# Altium PCB Sahasrara_Large-1_review_chandra.PcbDoc
Units mm, origin at the board's own origin, x right, y up, seen from the top; angles counter-clockwise.
Board outline 47.02 x 73.55 mm, 2 copper layers (Top Layer, Bottom Layer); 44 components, 47 nets, 146 pads, 172 vias.
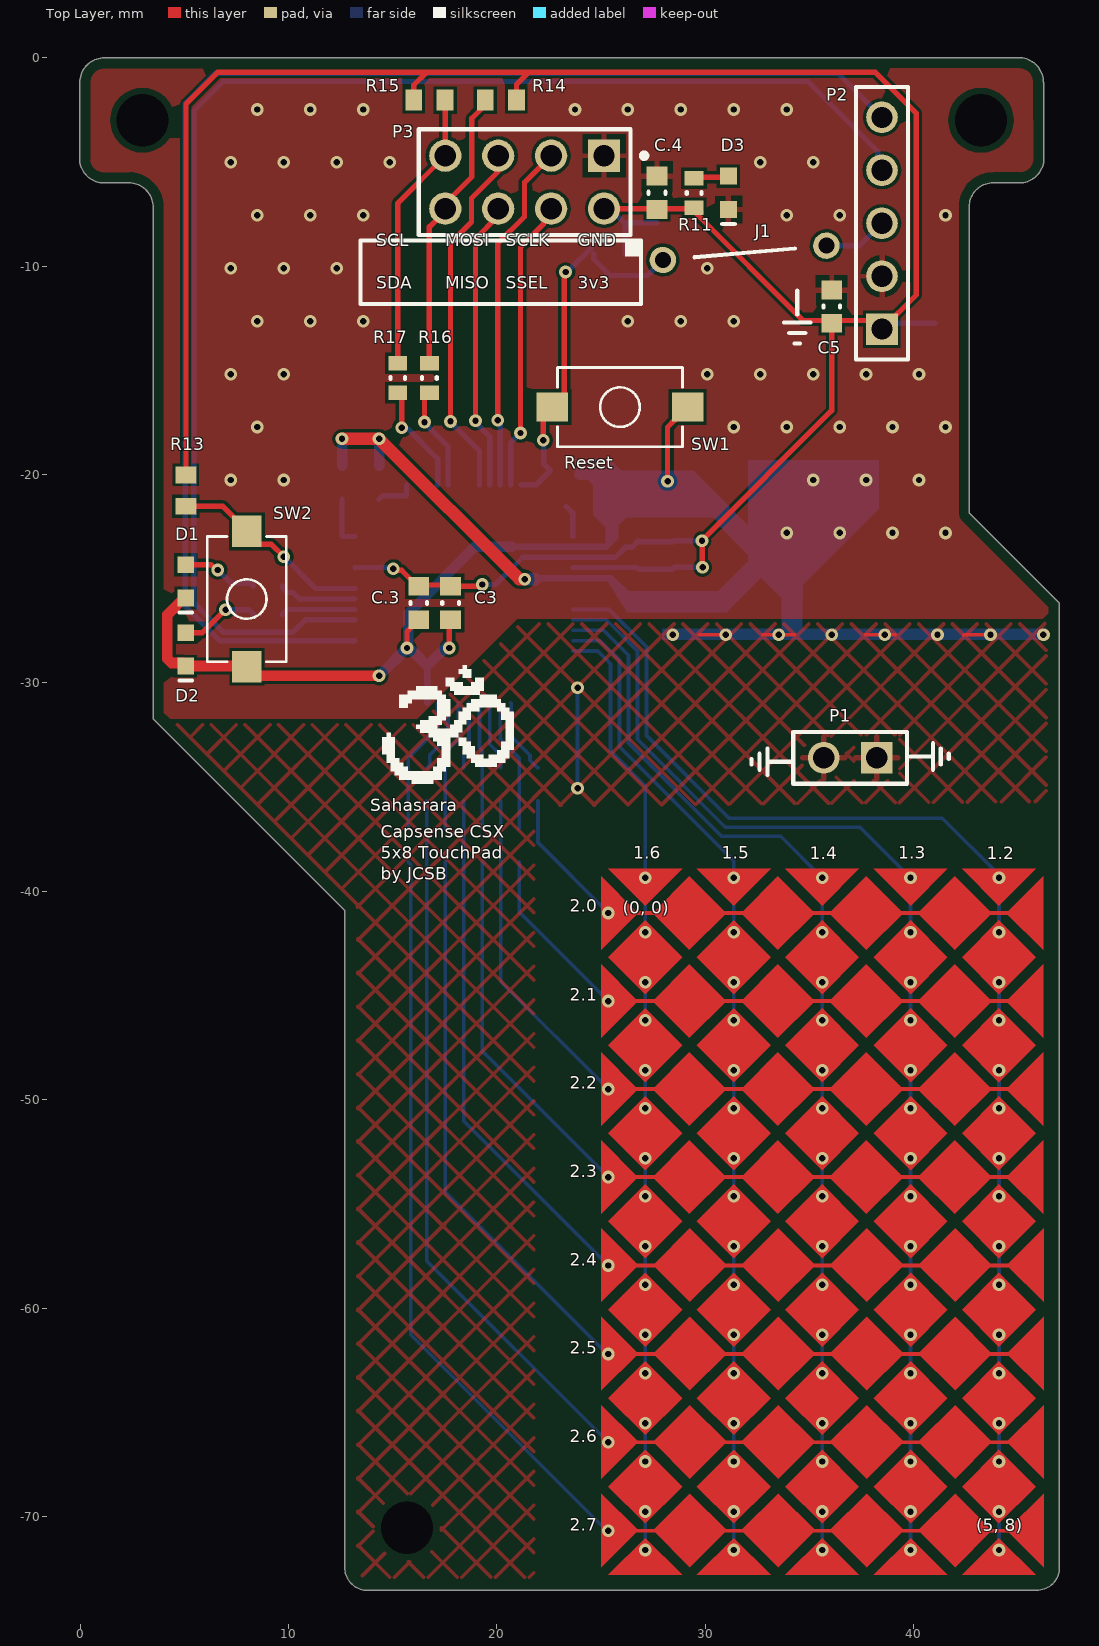
[diagram p0: Top Layer view]
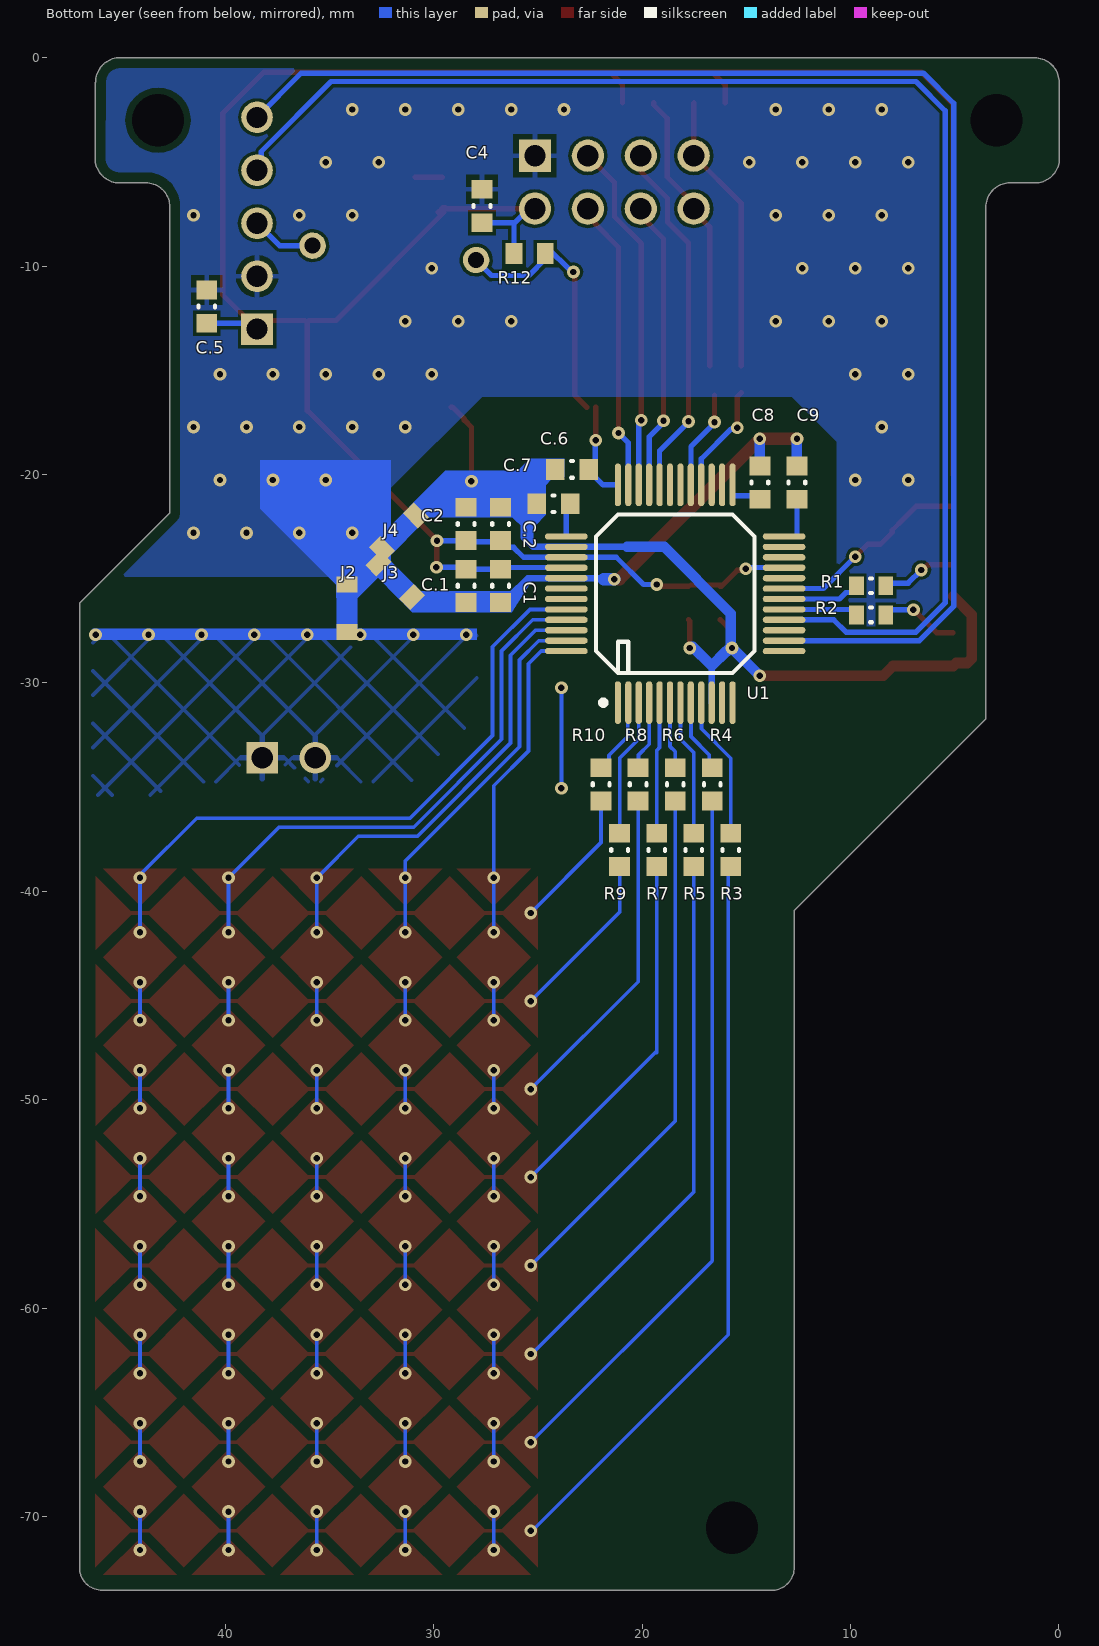
[diagram p1: Bottom Layer view, seen from below]

## Layer stack, top to bottom
Top Solder: solder mask 0.0102, Solder Resist, Dk 3.5
Top Layer: signal copper 0.0356
Dielectric 1: dielectric 0.32, FR-4, Dk 4.8
Bottom Layer: signal copper 0.0356
Bottom Solder: solder mask 0.0102, Solder Resist, Dk 3.5

## Board outline
3.51,-31.726 3.51,-7.167 ccw(c2.347,-7.167) 2.347,-6.004 1.152,-6.004 cw(c1.152,-4.83) -0.022,-4.83 -0.009,-4.83 -0.009,-1.186 cw(c1.177,-1.186) 1.177,0 45.034,0 45.042,0.009 cw(c45.042,-1.177) 46.228,-1.177 46.237,-1.186 46.237,-4.83 46.25,-4.83 cw(c45.076,-4.83) 45.076,-6.004 43.813,-6.004 ccw(c43.813,-7.151) 42.666,-7.151 42.672,-7.151 42.672,-21.844 43.942,-23.114 46.99,-26.162 46.99,-72.461 46.996,-72.461 cw(c45.925,-72.461) 45.925,-73.533 13.809,-73.533 13.809,-73.545 cw(c13.809,-72.435) 12.7,-72.435 12.7,-40.915

## Design rules (kind name [scope] priority, off if disabled: settings)
BoardOutlineClearance [All] p1: gap=0.254 ignorepadtopadclearanceinfootprint=FALSE except(0: Arc-SplitContinuation Track-SplitContinuation SMDPad-SplitContinuation THPad-SplitContinuation Via-SplitContinuation Fill-SplitContinuation Poly-SplitContinuation Region-SplitContinuation Text-SplitContinuation; 0.508: Poly-OutlineEdge Poly-CavityEdge Poly-CutoutEdge Poly-SplitBarrior)
Clearance [All] p1: gap=0.152 ignorepadtopadclearanceinfootprint=FALSE except(0.305: Arc-Hole Track-Hole SMDPad-Hole THPad-Hole Via-Hole Fill-Hole Poly-Hole Region-Hole)
HoleSize [All] p1: absolutevalues=TRUE maxlimit=6.3 minlimit=0.3 maxpercent=80.000 minpercent=20.000
MinimumAnnularRing [All] p1: minimumring=0.152
PolygonConnect PolygonConnect_1 [All] p1: thpad.connectstyle=Relief thpad.reliefconductorwidth=0.254 thpad.reliefentries=4 thpad.polygonreliefangle="90 Angle" thpad.airgapwidth=0.254 smdpad.connectstyle=Relief smdpad.reliefconductorwidth=0.254 smdpad.reliefentries=4 smdpad.polygonreliefangle="90 Angle" smdpad.airgapwidth=0.254 via.connectstyle=Direct via.reliefconductorwidth=0.254 via.reliefentries=4 via.polygonreliefangle="90 Angle" via.airgapwidth=0.254
PolygonConnect gnd_stitch_via [InNet('GND') vs InNet('GND')] p2: thpad.connectstyle=Relief thpad.reliefconductorwidth=0.254 thpad.reliefentries=4 thpad.polygonreliefangle="90 Angle" thpad.airgapwidth=0.254 smdpad.connectstyle=Relief smdpad.reliefconductorwidth=0.254 smdpad.reliefentries=4 smdpad.polygonreliefangle="90 Angle" smdpad.airgapwidth=0.254 via.connectstyle=Direct via.reliefconductorwidth=0.254 via.reliefentries=4 via.polygonreliefangle="90 Angle" via.airgapwidth=0.254
PolygonConnect gnd_ties [InComponentClass('net_ties')] p3: connectstyle=Direct reliefconductorwidth=0.254 reliefentries=4 polygonreliefangle="90 Angle" airgapwidth=0.254
RoomDefinition Power [InComponentClass('Power')] p1: confinementstyle=ConfineOut formatcopy=TRUE lockcomponents=FALSE outline 39.294,-114.239 90.094,-114.239 90.094,-88.839 39.294,-88.839
RoomDefinition CY8C4125AZI-S433 [InComponentClass('CY8C4125AZI-S433')] p2: confinementstyle=ConfineOut formatcopy=TRUE lockcomponents=FALSE outline -18.415,-114.239 32.385,-114.239 32.385,-88.839 -18.415,-88.839
RoomDefinition CSX_Capsense [InComponentClass('CSX_Capsense')] p3: confinementstyle=ConfineOut formatcopy=TRUE lockcomponents=FALSE outline 49.403,-66.995 57.912,-66.995 57.912,-62.423 49.403,-62.423
RoomDefinition Comm [InComponentClass('Comm')] p4: confinementstyle=ConfineOut formatcopy=TRUE lockcomponents=FALSE outline 52.908,-72.177 56.718,-72.177 56.718,-67.605 52.908,-67.605
RoutingVias [All] p1: holewidth=0.711 width=1.27 viastyle="Through Hole" minholewidth=0.305 minwidth=0.61 maxholewidth=0.711 maxwidth=1.27
SilkToSilkClearance [All] p1: silktosilkclearance=0.102
SilkToSolderMaskClearance [IsPad] p1: minsilkscreentomaskgap=0.178 clearancetoexposedcopper=TRUE
SolderMaskExpansion [All] p1: expansion=0.102 istentingtop=FALSE
Width [All] p1: maxlimit=3.556 minlimit=0.152 preferedwidth=0.254 toplayer_maxwidth=2.54 minimp=50.000000 maximp=50.000000 favimp=50.000000
27 further rules are at their usual default settings.

## Classes and differential pairs
component class Power: D3 J2 J3 J4 R11
component class CY8C4125AZI-S433: C1 C2 C3 C.1 C.2 C.3 C.7 R14 R15 R16 R17 U1
component class CSX_Capsense: C8 C9 P1 R3 R4 R5 R6 R7 R8 R9 R10
component class Comm: C4 C5 C.4 C.5 C.6 D1 D2 J1 P2 P3 R1 R2 R12 R13 SW1 SW2

## Components (designator, comment, footprint, x,y, rotation, side; value= is the part's Value field where it differs from the comment)
C1 "1uF" CAPC0603(1608)100_N 26.797,-25.339 r90 bottom
C2 "1uF" CAPC0603(1608)100_N 28.448,-22.367 r90 bottom
C3 "1uF" CAPC0603(1608)100_N 17.78,-26.162 r270 top
C4 "1uF" CAPC0603(1608)100_N 27.686,-7.112 r90 bottom
C5 "1uF" CAPC0603(1608)100_N 36.068,-11.938 r270 top
C8 "470pF" CAPC0603(1608)100_N 14.351,-20.386 r90 bottom
C9 "470pF" CAPC0603(1608)100_N 12.573,-20.386 r90 bottom
C.1 "0.1uF" CAPC0603(1608)100_N 28.448,-25.339 r90 bottom value=1uF
C.2 "0.1uF" CAPC0603(1608)100_N 26.797,-22.367 r90 bottom value=1uF
C.3 "0.1uF" CAPC0603(1608)100_N 16.256,-26.162 r270 top value=1uF
C.4 "0.1uF" CAPC0603(1608)100_N 27.686,-6.477 r90 top value=1uF
C.5 "0.1uF" CAPC0603(1608)100_N 40.894,-11.938 r270 bottom value=1uF
C.6 "0.1uF" CAPC0603(1608)100_N 23.368,-19.751 r180 bottom value=1uF
C.7 "0.1uF" CAPC0603(1608)100_N 24.257,-21.402 r0 bottom value=1uF
D1 "150060BS75000" 0603_A 5.08,-25.123 r90 top
D2 "150060BS75000" 0603_A 5.08,-28.387 r90 top
D3 "150060BS75000" 0603_A 31.115,-6.477 r90 top
J1 "long jumper" PCBComponent_1 27.97,-9.703 r5 top
J2 "net_tie_40mil" net_tie 34.163,-26.416 r90 bottom net-tie
J3 "net_tie_40mil" net_tie 31.852,-25.07 r45 bottom net-tie
J4 "net_tie_40mil" net_tie 31.672,-22.765 r315 bottom net-tie
P1 "MTLW-102-05-T-S-172" SMTC-MTLW-102-05-X-S-172 38.227,-33.594 r180 top
P2 "MTLW-105-05-L-S-190" SMTC-MTLW-105-05-X-S-190 38.481,-13.02 r90 top
P3 "TSW-104-08-L-D" SMTC-TSW-104-08-L-D_V 21.336,-5.969 r180 top
R1 "330" RESC0603(1608)_L 9.017,-25.339 r180 bottom value="330.00 Ohm"
R2 "330" RESC0603(1608)_L 9.017,-26.736 r180 bottom value="330.00 Ohm"
R3 "2K" RESC0603(1608)_N 15.748,-38.011 r270 bottom value="2000.00 Ohm"
R4 "2K" RESC0603(1608)_N 16.637,-34.864 r270 bottom value="2000.00 Ohm"
R5 "2K" RESC0603(1608)_N 17.526,-38.011 r270 bottom value="2000.00 Ohm"
R6 "2K" RESC0603(1608)_N 18.415,-34.864 r270 bottom value="2000.00 Ohm"
R7 "2K" RESC0603(1608)_N 19.304,-38.011 r270 bottom value="2000.00 Ohm"
R8 "2K" RESC0603(1608)_N 20.193,-34.864 r270 bottom value="2000.00 Ohm"
R9 "2K" RESC0603(1608)_N 21.082,-38.011 r270 bottom value="2000.00 Ohm"
R10 "2K" RESC0603(1608)_N 21.971,-34.864 r270 bottom value="2000.00 Ohm"
R11 "330" RESC0603(1608)_L 29.464,-6.488 r90 top value="330.00 Ohm"
R12 "10K" RESC1608X55X25ML10T15 25.4,-9.398 r0 bottom
R13 "10K" RESC1608X55X25ML10T15 5.08,-20.767 r90 top
R14 "4.7K" RESC1608X55X25ML10T15 20.193,-2.032 r0 top
R15 "4.7K" RESC1608X55X25ML10T15 16.764,-2.032 r180 top
R16 "330" RESC0603(1608)_L 16.764,-15.367 r90 top value="330.00 Ohm"
R17 "330" RESC0603(1608)_L 15.24,-15.367 r90 top value="330.00 Ohm"
SW1 "434121025816" 434121025816 25.908,-16.764 r0 top
SW2 "434121025816" 434121025816 8.001,-25.974 r270 top
U1 "CY8C4125AZI-S433" CY8C4125AZI-S433 18.415,-25.72 r90 bottom locked

## Footprints (in the part's own frame and the unit in brackets; to place one, negate y for a bottom-side part, rotate by r counter-clockwise, add the part's x,y. Pads: shape width x height; smd on the part's side, far side on the other; paste and mask are expansions set on the pad)
0603_A [mm] "Chip LED, 2-Leads, Body 1.6x0.8mm, IPC Medium Density"
  rect 0.8x0.8 smd: 1(-0.8,0) 2(0.8,0)
  silkscreen extent -1.5,-0.3 -1.5,0.3, body extent -0.8,-0.4 0.8,0.4, height 0.7
434121025816 [mm] "6.0*3.8mm vertical type, SMD, height 2.5mm, black actuator, 160gf, T&R"
  rect 1.5x1.4 smd: 1(-3.25,0) 2(3.25,0)
  silkscreen extent -3,-1.9 3,1.9, body extent -3.65,-1.95 3.65,1.95, height 2.5
CAPC0603(1608)100_N [mm] "Chip Capacitor, Body 1.6x0.8mm, Height 1.0mm, IPC Medium Density"
  rect 0.9x1 smd: 1(-0.8,0) 2(0.8,0)
  silkscreen extent -0.05,-0.4 0.05,0.4, body extent -0.87,-0.48 0.88,0.47, height 1
CY8C4125AZI-S433 [mm] "CQFP, 48-Leads, Body 11.70x11.70mm, Pitch 0.50mm, IPC Medium Density"
  oval 2.05x0.3 smd: 1(-5.225,2.75) 2(-5.225,2.25) 3(-5.225,1.75) 4(-5.225,1.25) 5(-5.225,0.75) 6(-5.225,0.25) 7(-5.225,-0.25) 8(-5.225,-0.75) 9(-5.225,-1.25) 10(-5.225,-1.75) 11(-5.225,-2.25) 12(-5.225,-2.75) 25(5.225,-2.75) 26(5.225,-2.25) 27(5.225,-1.75) 28(5.225,-1.25) 29(5.225,-0.75) 30(5.225,-0.25) 31(5.225,0.25) 32(5.225,0.75) 33(5.225,1.25) 34(5.225,1.75) 35(5.225,2.25) 36(5.225,2.75)
  oval 0.3x2.05 smd: 13(-2.75,-5.225) 14(-2.25,-5.225) 15(-1.75,-5.225) 16(-1.25,-5.225) 17(-0.75,-5.225) 18(-0.25,-5.225) 19(0.25,-5.225) 20(0.75,-5.225) 21(1.25,-5.225) 22(1.75,-5.225) 23(2.25,-5.225) 24(2.75,-5.225) 37(2.75,5.225) 38(2.25,5.225) 39(1.75,5.225) 40(1.25,5.225) 41(0.75,5.225) 42(0.25,5.225) 43(-0.25,5.225) 44(-0.75,5.225) 45(-1.25,5.225) 46(-1.75,5.225) 47(-2.25,5.225) 48(-2.75,5.225)
  silkscreen extent -5.35,-3.8 3.8,3.8, body extent -3.5,-3.5 3.5,3.5, height 1.4
net_tie [mil]
  rect 30x40 smd paste-100 mask-100: 1(-45,0) 2(45,0)
  Top Layer region: -125,30
  Top Layer lines w40: -35,0 35,0
PCBComponent_1 [mil]
  round 50 hole 30: 1(0,0) 2(310,0)
  silkscreen extent 60,0 250,0
RESC0603(1608)_L [mm] "Chip Resistor, Body 1.6x0.8mm, IPC High Density"
  rect 0.7x0.9 smd: 1(-0.7,0) 2(0.7,0)
  silkscreen extent -0.05,-0.35 0.05,0.35, body extent -0.85,-0.47 0.85,0.47, height 0.6
RESC0603(1608)_N [mm] "Chip Resistor, Body 1.6x0.8mm, IPC Medium Density"
  rect 0.9x1 smd: 1(-0.8,0) 2(0.8,0)
  silkscreen extent -0.05,-0.4 0.05,0.4, body extent -0.85,-0.47 0.85,0.47, height 0.6
RESC1608X55X25ML10T15 [mm] "Chip Resistor, 2-Leads, Body 1.60x0.80mm, IPC Low Density"
  rect 0.8x1 smd: 1(-0.75,0) 2(0.75,0)
  body extent -0.85,-0.45 0.85,0.45, height 0.55
SMTC-MTLW-102-05-X-S-172 [mm] "Terminal Assembly, 1x2 Pins, Vertical, 2.54mm Pitch, Male"
  rect 1.52x1.52 hole 1.02: 1(0,0)
  round 1.52 hole 1.02: 2(2.54,0)
  silkscreen extent -1.46,-1.24 4,1.24, body extent -1.27,-1.24 3.81,1.24, height 5.89
SMTC-MTLW-105-05-X-S-190 [mm] "Terminal Assembly, 1x5 Pins, Vertical, 2.54mm Pitch, Male"
  rect 1.52x1.52 hole 1.02: 1(0,0)
  round 1.52 hole 1.02: 2(2.54,0) 3(5.08,0) 4(7.62,0) 5(10.16,0)
  silkscreen extent -1.46,-1.24 11.62,1.24, body extent -1.27,-1.24 11.43,1.24, height 6.35
SMTC-TSW-104-08-L-D_V [mm] "CONN, 8-Leads, Body 10.16x5.08mm, Pitch 2.54mm"
  rect 1.55x1.55 hole 1.02: 1(-3.81,-1.27)
  round 1.55 hole 1.02: 2(-3.81,1.27) 3(-1.27,-1.27) 4(-1.27,1.27) 5(1.27,-1.27) 6(1.27,1.27) 7(3.81,-1.27) 8(3.81,1.27)
  silkscreen extent -5.86,-2.54 5.08,2.54, body extent -5.08,-2.54 5.08,2.54, height 8.38

## Part data
C1 C2 C3 C4 C5: library part CMP-1035-02746-1, "CAP 1uF 50V ±20% 0603 (1608 Metric) Thickness 1mm SMD", Case-EIA=0603, Case-Metric=1608, Rated Voltage="50 V", Tolerance=Â±20%, Max Thickness="1 mm", Technology=SMT
C8 C9: library part CMP-1035-01661-1, "CAP 470pF 10V ±10% 0603 (1608 Metric) Thickness 1mm SMD", Case-EIA=0603, Case-Metric=1608, Rated Voltage="10 V", Tolerance=Â±10%, Max Thickness="1 mm", Technology=SMT
C.1 C.2 C.3 C.4 C.5 C.6 C.7: library part CMP-1035-02746-1, "CAP 0.1 uF 50V ±20% 0603 (1608 Metric) Thickness 1mm SMD", Case-EIA=0603, Case-Metric=1608, Rated Voltage="50 V", Tolerance=Â±20%, Max Thickness="1 mm", Technology=SMT
D1 D2 D3: library part CMP-1426-00003-1, "SMD mono-color Chip LED, WL-SMCW, Blue", Color=Blue, Manufacturer="Wuerth Elektronik", ComponentLink1Description="Manufacturer URL", ComponentLink1URL=http://www.we-online.com, ComponentLink2Description=Datasheet, ComponentLink2URL=http://katalog.we-online.com/led/datasheet/150060BS75000.pdf, PackageReference=0603_A, PartNumber=150060BS75000
P1: library part CMP-1024-00065-1, "Low Profile .025\" SQ Post Header, Through-hole, Vertical, -55 to 105 degC, 2.54 mm Pitch, 2-Pin, Male, RoHS", Manufacturer=Samtec, Temperature Range="-55 to 105 degC", ComponentLink1Description="Manufacturer URL", ComponentLink1URL=http://www.samtec.com, ComponentLink2Description=Datasheet, ComponentLink2URL=http://www.samtec.com/documents/webfiles/pdf/MTLW_TH.PDF, ComponentLink3Description="Package Specification", ComponentLink3URL=http://www.samtec.com/documents/webfiles/cpdf/MTLW-1XX-XX-XX-X-XXX-XX-XX-MKT1.pdf, DatasheetVersion=F-214, Mounting Technology=Through-hole, Orientation=Vertical, PackageDescription="Low Profile Terminal Assembly", PackageReference=MTLW-102-05-X-S-172, PackageVersion="T, 6/1991", PartNumber=MTLW-102-05-T-S-172, Pitch="2.54 mm", RoHS=True
P2: library part CMP-1024-00079-1, "Low Profile .025\" SQ Post Header, Through-hole, Vertical, -55 to 125 degC, 2.54 mm Pitch, 5-Pin, Male, RoHS", Manufacturer=Samtec, Temperature Range="-55 to 125 degC", ComponentLink1Description="Manufacturer URL", ComponentLink1URL=http://www.samtec.com, ComponentLink2Description=Datasheet, ComponentLink2URL=http://www.samtec.com/documents/webfiles/pdf/MTLW_TH.PDF, ComponentLink3Description="Package Specification", ComponentLink3URL=http://www.samtec.com/documents/webfiles/cpdf/MTLW-1XX-XX-XX-X-XXX-XX-XX-MKT1.pdf, DatasheetVersion=F-214, Mounting Technology=Through-hole, Orientation=Vertical, PackageDescription="Low Profile Terminal Assembly", PackageReference=MTLW-105-05-X-S-190, PackageVersion="T, 6/1991", PartNumber=MTLW-105-05-L-S-190, Pitch="2.54 mm", RoHS=True
P3: library part CMP-1681-00006-4, "Male Header, Pitch 2.54 mm, 2 x 4 Position, Height 8.38 mm, Tail Length 5.08 mm, -55 to 125 degC, RoHS, Bulk", Colour=Black, Current Rating="7.6 A", Manufacturer=Samtec, Package Quantity=1, Voltage Rating="550 V", ComponentLink1Description="Manufacturer URL", ComponentLink1URL=http://www.samtec.com/, ComponentLink2Description=Datasheet, ComponentLink2URL=https://datasheet.ciiva.com/25616/0900766b81154476-25616879.pdf, ComponentLink3Description="Package Specification", ComponentLink3URL=http://suddendocs.samtec.com/prints/tsw-xxx-xx-x-x-xx-xxx-footprint.pdf, Contact Finish=Gold, Contact Material=Bronze, Contact Plating=Gold, DatasheetVersion=04/2012, Lead Pitch="0.1 inch", Mount="Through Hole", Mounting Technology="Through Hole", PackageDescription="Male Header, Pitch 2.54 mm, 2 x 4 Position, Height 8.38 mm, Tail Length 5.08 mm", PackageReference=TSW-104-08-L-D, Packaging=Bulk, Pins=8, REACH SVHC="No SVHC", RoHSCompliant=true, Rows=2
R1 R2 R11 R16 R17: library part CMP-1012-00062-1, "330R 0.1W 5% 0603 (1608 Metric)  SMD", Case-EIA=0603, Case-Metric=1608, Power="0.1 W", Tolerance="5 %", Technology=SMT
R3 R4 R5 R6 R7 R8 R9 R10: library part CMP-1012-00081-1, "2K 0.1W 5% 0603 (1608 Metric)  SMD", Case-EIA=0603, Case-Metric=1608, Power="0.1 W", Tolerance="5 %", Technology=SMT
R12 R13: library part CMP-2000-05024-1, "Chip Resistor, 4.7 KOhm, +/- 5%, 100 mW, -55 to 155 degC, 0603 (1608 Metric), RoHS, Tape and Reel", Case Code - in=0603, Case Code - mm=1608, Manufacturer=Yageo, Operating Temperature Range=-55Cto+155C, Package Description="2-Pin Surface Mount Device, Body 1.6 x 0.8 mm", Package Reference=603, Power Rating=100mW, Resistance=4.7kOhms, Temperature Coefficient=100PPM/C, Tolerance=5%, Voltage Rating=50V, Datasheet URL=http://www.yageo.com/documents/recent/PYu-RC_Group_51_RoHS_L_04.pdf, Datasheet Version="Rev. 4, 02/2016", Manufacturer URL=http://www.yageo.com/, Packaging=Reel, Product=ThickFilmResistorsGeneralPurpose, Series=RC, Termination Style=SMD/SMT
R14 R15: library part CMP-2000-05024-1, "RC0603JR-074K7L Chip Resistor, 4.7 KOhm, +/- 5%, 100 mW, -55 to 155 degC, 0603 (1608 Metric), RoHS, Tape and Reel", Case Code - in=0603, Case Code - mm=1608, Manufacturer=Yageo, Operating Temperature Range=-55Cto+155C, Package Description="2-Pin Surface Mount Device, Body 1.6 x 0.8 mm", Package Reference=603, Power Rating=100mW, Resistance=4.7kOhms, Temperature Coefficient=100PPM/C, Tolerance=5%, Voltage Rating=50V, Datasheet URL=http://www.yageo.com/documents/recent/PYu-RC_Group_51_RoHS_L_04.pdf, Datasheet Version="Rev. 4, 02/2016", Manufacturer URL=http://www.yageo.com/, Packaging=Reel, Product=ThickFilmResistorsGeneralPurpose, Series=RC, Termination Style=SMD/SMT
SW1 SW2: library part CMP-1459-00004-1, "WS-TASV SMD Tact Switch 6.0X3.8 mm", Manufacturer="Wuerth Elektronik", ComponentLink1Description="Manufacturer URL", ComponentLink1URL=http://www.we-online.com, ComponentLink2Description=Datasheet, ComponentLink2URL=http://katalog.we-online.de/em/datasheet/434121025816.pdf, NoPins=02, PackageReference=434121025816, PartNumber=434121025816

## Free pads (board coordinates)
  round 1.524 hole 2.5: 2(2.997,-2.997) 2(15.697,-70.536) 2(43.231,-2.997)

## Via types
v1: diameter 0.61, hole 0.305, Top Layer to Bottom Layer, 171 vias
v2: diameter 0.61, hole 0.305, Top Layer to Bottom Layer, tented both sides, 1 vias

## Nets (pads, with @x,y where several pads share a name; then routed paths per layer and width w, separated by ;. In a path a pad name is that pad's centre, name@x,y a point inside that pad or via, vN(x,y) a via of type N, cw(c..) or ccw(c..) an arc to the next point about the centre after c; other vN are vias at no path point)
+3v3: C1.2 C2.1 C3.1 C4.1 C5.2 C.1.2 C.2.1 C.3.1 C.4.1 C.5.2 P2.1 P3.2 R11.1 R12.2 R13.2 R14.2 R15.2 U1.21 U1.39 U1.40 | length 130.6
  Top Layer w0.254: R13.2 5.08,-2.225 6.604,-0.701 16.622,-0.701 ; v1(15.037,-24.522) 15.105,-24.59 15.434,-24.59 16.206,-25.362 C.3.1 ; R15.2@16.014,-2.159 16.014,-1.31 16.622,-0.701 ; C.3.1@16.256,-25.301 C3.1@17.653,-25.301 ; C3.1 19.215,-25.362 v1(19.304,-25.273) ; R14.2@20.943,-2.159 20.943,-1.282 21.524,-0.701 ; P3.2 29.413,-7.239 R11.1 29.564,-7.188 R11.1@29.787,-7.411 ; R11.1@29.51,-7.412 34.701,-12.603 C5.2@36.01,-12.603 ; v1(29.874,-24.45) 29.859,-24.436 29.859,-23.195 v1(29.845,-23.18) 29.845,-23.155 36.068,-16.932 C5.2 ; C5.2@36.195,-12.611 38.072,-12.611 P2.1 40.132,-11.369 40.132,-2.667 38.166,-0.701 21.524,-0.701 ; 16.622,-0.701 21.524,-0.701
  Bottom Layer w0.254: U1.21 13.199,-24.461 v1@15.037,-24.461 ; v1(19.304,-25.273) 19.939,-25.273 21.242,-23.97 U1.39 25.687,-23.97 26.167,-23.49 26.474,-23.49 C.2.1 ; U1.40@23.64,-24.462 26.72,-24.462 C1.2 C.1.2 28.537,-24.45 v1(29.874,-24.45) ; P3.2 25.435,-7.239 26.108,-7.912 ; R12.2 26.15,-7.954 26.108,-7.912 ; C.2.1@26.797,-23.218 28.448,-23.218 28.486,-23.18 v1(29.845,-23.18) ; C4.1 26.108,-7.912 ; P2.1@38.072,-12.611 P2.1 38.763,-12.738 C.5.2 C.5.2@41.021,-12.738
CintA: C9.1 U1.24 | length 2.4
  Bottom Layer w0.254: C9.1 12.573,-22.949 12.594,-22.97 U1.24
CintB: C8.1 U1.25 | length 1.9
  Bottom Layer w0.254: C8.1 14.516,-21.021 15.644,-21.021 15.665,-21 U1.25
GND: C4.2 C5.1 C.4.2 C.5.1 D3.1 J2.2 J3.2 J4.2 P2.2 P3.1
  other v1: 33.909,-22.799 36.449,-22.799 38.989,-22.799 41.529,-22.799 7.239,-20.259 9.779,-20.259 35.179,-20.259 37.719,-20.259 40.259,-20.259 8.509,-17.719 31.369,-17.719 33.909,-17.719 36.449,-17.719 38.989,-17.719 41.529,-17.719 7.239,-15.179 9.779,-15.179 30.099,-15.179 32.639,-15.179 35.179,-15.179 37.719,-15.179 40.259,-15.179 8.509,-12.639 11.049,-12.639 13.589,-12.639 26.289,-12.639 28.829,-12.639 31.369,-12.639 7.239,-10.099 9.779,-10.099 12.319,-10.099 30.099,-10.099 8.509,-7.559 11.049,-7.559 13.589,-7.559 33.909,-7.559 36.449,-7.559 41.529,-7.559 7.239,-5.019 9.779,-5.019 12.319,-5.019 14.859,-5.019 32.639,-5.019 35.179,-5.019 8.509,-2.479 11.049,-2.479 13.589,-2.479 23.749,-2.479 26.289,-2.479 28.829,-2.479 31.369,-2.479 33.909,-2.479
LED1: R2.1 U1.17 | length 3.6
  Bottom Layer w0.254: R2.1 9.717,-26.693 9.94,-26.47 U1.17
LED2: R1.1 U1.18 | length 3.8
  Bottom Layer w0.254: R1.1 9.717,-25.437 9.94,-25.66 10.227,-25.66 10.537,-25.97 U1.18
MISO: P3.6 U1.33 | length 14
  Top Layer w0.254: v1(18.974,-17.424) 18.974,-8.682 20.056,-7.6 P3.6@20.056,-7.249
  Bottom Layer w0.254: v1(18.974,-17.424) 18.974,-17.501 19.665,-18.192 U1.33
MOSI: P3.5 U1.32 | length 17.3
  Top Layer w0.254: v1(17.78,-17.45) 17.78,-8.89 18.786,-7.884 18.786,-6.741 20.056,-5.471 P3.5@20.056,-4.709
  Bottom Layer w0.254: v1(17.78,-17.45) 17.78,-17.475 19.165,-18.86 U1.32
NetC.7_1: C.7.1 U1.37 | length 1.6
  Bottom Layer w0.254: C.7.1@23.33,-21.529 23.64,-21.839 U1.37
NetD1_2: D1.2 R1.2 | length 3.8
  Top Layer w0.254: D1.2 6.277,-24.323 6.531,-24.577 v1(6.604,-24.577)
  Bottom Layer w0.254: v1@6.7,-24.577 v1(6.604,-24.577) 7.239,-25.212 8.19,-25.212 R1.2
NetD2_2: D2.2 R2.2 | length 3.8
  Top Layer w0.254: D2.2 5.88,-27.587 v1(6.985,-26.482)
  Bottom Layer w0.254: v1(6.985,-26.482) 8.094,-26.482 8.317,-26.705 R2.2
NetD3_2: D3.2 R11.2 | length 1.3
  Top Layer w0.254: R11.2@29.591,-5.739 D3.2@30.888,-5.739
NetJ1_2: J1.2 P2.3 | length 3
  Bottom Layer w0.254: J1.2@35.941,-9.017 37.404,-9.017 P2.3
NetR16_1: R16.1 U1.29 | length 4.8
  Top Layer w0.254: v1(16.529,-17.481) R16.1@16.529,-16.194
  Bottom Layer w0.254: v1(16.529,-17.481) 16.529,-17.52 17.659,-18.65 17.659,-20.489 U1.29
NetR17_1: R17.1 U1.28 | length 5.4
  Top Layer w0.254: R17.1 15.443,-16.27 v1(15.443,-17.755)
  Bottom Layer w0.254: v1(15.443,-17.755) 15.511,-17.823 15.74,-17.823 17.165,-19.248 U1.28
RX0: R10.1 U1.2 | length 3.7
  Bottom Layer w0.178: U1.2 20.688,-30.969 20.688,-32.566 21.593,-33.47 21.593,-33.703 21.954,-34.064 R10.1
RX0_PAD: R10.2 | length 26.3
  Top Layer w0.178: v1(25.345,-41.042) 44.903,-41.042
  Bottom Layer w0.178: R10.2 21.971,-37.658 25.345,-41.032 v1(25.345,-41.042)
RX1: R9.1 U1.3 | length 6.4
  Bottom Layer w0.178: U1.3 20.165,-32.691 21.082,-33.608 R9.1@21.082,-36.985
RX1_PAD: R9.2 | length 28
  Top Layer w0.178: v1(25.345,-45.265) 44.903,-45.265
  Bottom Layer w0.178: R9.2@21.082,-38.585 21.082,-41.002 v1(25.345,-45.265)
RX2: R8.1 U1.4 | length 3.3
  Bottom Layer w0.178: U1.4 19.665,-32.939 20.177,-33.452 20.177,-34.049 R8.1
RX2_PAD: R8.2 | length 35.5
  Top Layer w0.178: v1(25.345,-49.488) 44.903,-49.488
  Bottom Layer w0.178: R8.2 20.193,-44.336 v1(25.345,-49.488)
RX3: R7.1 U1.5 | length 6.1
  Bottom Layer w0.178: U1.5 19.165,-33.103 19.304,-33.242 R7.1@19.304,-36.985
RX3_PAD: R7.2 | length 37.2
  Top Layer w0.178: v1(25.345,-53.711) 44.903,-53.711
  Bottom Layer w0.178: 19.304,-47.733 R7.2@19.304,-38.649 ; R7.2@19.304,-38.585 R7.2@19.368,-38.649 ; 19.368,-47.733 v1(25.345,-53.711)
RX4: R6.1 U1.6 | length 3.2
  Bottom Layer w0.178: R6.1 18.415,-33.294 18.665,-33.044 U1.6
RX4_PAD: R6.2 | length 44.7
  Top Layer w0.178: v1(25.345,-57.954) 44.903,-57.954
  Bottom Layer w0.178: R6.2 18.415,-51.024 v1(25.345,-57.954)
RX5: R5.1 U1.7 | length 6.3
  Bottom Layer w0.178: R5.1@17.526,-36.985 17.526,-33.34 18.165,-32.701 U1.7
RX5_PAD: R5.2 | length 46.4
  Top Layer w0.178: v1(25.345,-62.197) 44.903,-62.197
  Bottom Layer w0.178: R5.2@17.526,-38.585 17.526,-54.422 25.301,-62.197 v1(25.345,-62.197)
RX6: R4.1 U1.8 | length 3.5
  Bottom Layer w0.178: R4.1 16.78,-33.922 16.78,-33.452 17.656,-32.575 17.656,-30.954 U1.8
RX6_PAD: R4.2 | length 53.9
  Top Layer w0.178: v1(25.345,-66.44) 44.903,-66.44
  Bottom Layer w0.178: R4.2 16.637,-57.732 v1(25.345,-66.44)
RX7: R3.1 U1.9 | length 6.6
  Bottom Layer w0.178: R3.1@15.748,-36.985 15.748,-33.608 17.156,-32.2 17.156,-30.954 U1.9
RX7_PAD: R3.2 | length 55.7
  Top Layer w0.178: v1(25.345,-70.683) 44.903,-70.683
  Bottom Layer w0.178: R3.2@15.748,-38.585 15.875,-38.712 15.875,-61.28 25.278,-70.683 v1(25.345,-70.683)
SCL: P3.7 R15.1 R17.2 | length 13.6
  Top Layer w0.254: R17.2@15.24,-14.794 15.24,-6.985 P3.7 17.526,-2.171 R15.1@17.514,-2.159
SCLK: P3.3 U1.34 | length 16.9
  Top Layer w0.254: v1(20.041,-17.399) 20.041,-8.915 21.326,-7.63 21.326,-5.979 P3.3@22.596,-4.709
  Bottom Layer w0.254: v1(20.041,-17.399) 20.165,-17.523 U1.34
SCLK_SWD: P2.4 U1.16 | length 68
  Bottom Layer w0.254: U1.16 10.805,-26.97 10.212,-27.564 6.863,-27.564 5.461,-26.162 5.461,-2.54 6.858,-1.143 34.925,-1.143 38.279,-4.497 38.279,-5.198 P2.4
SDA: P3.8 R14.1 R16.2 | length 13.7
  Top Layer w0.254: R16.2@16.764,-14.794 16.764,-8.112 17.526,-7.35 P3.8 17.526,-6.985 18.796,-5.715 18.796,-2.906 19.443,-2.259 R14.1@19.443,-2.159
SDAT: P2.5 U1.14 | length 67.9
  Bottom Layer w0.254: U1.14 6.695,-27.97 5.055,-26.33 5.055,-2.184 6.502,-0.737 36.357,-0.737 P2.5
SSEL: P3.4 U1.35 | length 14
  Top Layer w0.254: v1(21.133,-18.009) 21.133,-9.093 22.223,-8.003 22.223,-7.973 22.596,-7.6 P3.4@22.596,-7.249
  Bottom Layer w0.254: U1.35 20.665,-18.476 v1(21.133,-18.009)
TX0: U1.48 | length 29.3
  Bottom Layer w0.178: U1.48 24.848,-28.47 25.451,-29.073 25.451,-33.264 27.123,-34.936 v1(27.123,-39.343) v1(27.123,-41.963) ; v1(27.123,-71.604) v1(27.123,-69.761) v1@27.123,-69.561 ; v1@27.123,-67.561 v1(27.123,-67.361) v1(27.123,-65.518) v1@27.123,-65.318 ; v1(27.123,-63.118) v1(27.123,-61.275) ; v1(27.123,-58.875) v1(27.123,-57.032) ; v1(27.123,-54.632) v1(27.123,-52.809) ; v1(27.123,-50.409) v1(27.123,-48.586) v1@27.123,-48.386 ; v1(27.123,-46.186) v1(27.123,-44.363)
TX1: U1.47 | length 32.8
  Bottom Layer w0.178: U1.47 24.959,-27.97 25.883,-28.894 25.883,-33.061 31.366,-38.544 v1(31.366,-39.343) v1(31.366,-41.963) ; v1(31.366,-71.604) v1@31.366,-69.561 ; v1(31.366,-67.361) v1(31.366,-65.518) ; v1(31.366,-63.118) v1(31.366,-61.275) ; v1(31.366,-58.875) v1(31.366,-57.032) ; v1(31.366,-54.632) v1(31.366,-52.809) ; v1(31.366,-50.409) v1(31.366,-48.586) ; v1(31.366,-46.186) v1(31.366,-44.363) v1(31.366,-46.186)
  other v1: 31.366,-69.761
TX2: U1.46 | length 34.9
  Bottom Layer w0.178: U1.46 23.646,-27.476 25.124,-27.476 26.314,-28.667 26.314,-32.882 30.786,-37.353 33.619,-37.353 v1(35.609,-39.343) v1(35.609,-41.963) ; v1(35.609,-71.604) v1(35.609,-69.761) ; v1(35.609,-67.361) v1(35.609,-65.518) ; v1(35.609,-63.118) v1(35.609,-61.275) ; v1(35.609,-58.875) v1(35.609,-57.032) ; v1(35.609,-54.632) v1@35.609,-52.789 ; v1(35.609,-50.409) v1@35.609,-48.566 ; v1(35.609,-46.186) v1@35.609,-44.343
  other v1: 35.609,-52.809 35.609,-48.586 35.609,-44.363
TX3: U1.45 | length 39.3
  Bottom Layer w0.178: U1.45 25.253,-26.97 26.746,-28.463 26.746,-32.703 30.965,-36.922 37.431,-36.922 v1(39.852,-39.343) v1(39.852,-41.963) ; v1(39.852,-71.604) v1(39.852,-69.761) ; v1(39.852,-67.361) v1(39.852,-65.518) ; v1(39.852,-63.118) v1(39.852,-61.275) ; v1(39.852,-58.875) v1(39.852,-57.032) ; v1(39.852,-54.632) v1@39.852,-52.789 ; v1(39.852,-50.409) v1@39.852,-48.566 ; v1(39.852,-46.186) v1@39.852,-44.343
  other v1: 39.852,-52.809 39.852,-48.586 39.852,-44.363
TX4: U1.44 | length 43.8
  Bottom Layer w0.178: U1.44 25.388,-26.47 27.178,-28.26 27.178,-32.524 31.144,-36.49 41.377,-36.49 v1@44.095,-39.208 ; v1(44.095,-71.604) v1(44.095,-69.761) ; v1(44.095,-67.361) v1(44.095,-65.518) ; v1(44.095,-63.118) v1(44.095,-61.275) ; v1(44.095,-58.875) v1(44.095,-57.032) ; v1(44.095,-54.632) v1@44.095,-52.789 ; v1(44.095,-50.409) v1@44.095,-48.566 ; v1(44.095,-46.186) v1@44.095,-44.343 ; v1(44.095,-41.963) v1(44.095,-39.343)
  other v1: 44.095,-52.809 44.095,-48.586 44.095,-44.363
USER_SWITCH: R13.1 SW2.1 U1.19 | length 9.8
  Top Layer w0.254: R13.1 6.844,-21.517 7.428,-22.101 8.001,-22.674 8.001,-22.774 8.574,-23.347 9.184,-23.347 v1(9.779,-23.942)
  Bottom Layer w0.254: v1(9.779,-23.942) 11.307,-25.47 U1.19
VSS_Capsense: J2.1 P1.1 P1.2 | length 10.3
  Top Layer w0.178: 29.718,-27.686 v1@30.734,-27.686 ; 32.766,-27.686 34.29,-27.686 ; 37.694,-27.686 38.354,-27.686 39.116,-27.686 ; 42.401,-27.703 42.418,-27.686 43.434,-27.686 v1@43.942,-27.686
  Bottom Layer w0.178: v1(23.876,-35.052) v1(23.876,-30.226)
  other v1: 28.448,-27.686 30.988,-27.686 33.528,-27.686 36.068,-27.686 38.608,-27.686 41.148,-27.686 43.688,-27.686 46.228,-27.686
VSSA: C1.1 C8.2 C9.2 C.1.1 J3.1 U1.41 | length 24.1
  Top Layer w0.61: v1(12.573,-18.288) v1(14.351,-18.288) 21.082,-25.019 v1(21.336,-25.019)
  Bottom Layer w0.254: C1.1@26.341,-25.816 26.474,-25.816 C1.1 C.1.1 30.734,-26.139
  Bottom Layer w0.305: 21.844,-25.019 21.893,-24.97 25.495,-24.97 C1.1@26.341,-25.816
  Bottom Layer w0.508: C9.2 v1(12.573,-18.288) ; C8.2 v1(14.351,-18.288)
  Bottom Layer w0.61: v1(21.336,-25.019) 21.844,-25.019
VSSD: C2.2 C3.2 C.2.2 C.3.2 C.6.1 C.7.2 D1.1 D2.1 J4.1 SW1.2 SW2.2 U1.10 U1.38 | length 40.9
  Top Layer w0.254: v1(15.687,-28.321) 15.687,-27.531 C.3.2 ; v1(17.718,-28.321) 17.718,-27.024 C3.2 ; v1(28.194,-20.32) 28.194,-17.728 28.535,-17.387 28.535,-17.337 29.108,-16.764 SW1.2
  Top Layer w0.508: D1.1@5.08,-25.847 4.191,-26.736 4.191,-28.829 4.403,-29.041 4.934,-29.041 D2.1 7.964,-29.187 SW2.2 8.434,-29.657 v2(14.351,-29.657)
  Bottom Layer w0.305: U1.10 16.665,-29.177 ; 20.718,-23.47 25.237,-23.47 25.684,-23.023 25.684,-22.388
  Bottom Layer w0.508: v2(14.351,-29.657) v1(15.687,-28.321) ; v1@17.591,-28.26 17.582,-28.26 16.665,-29.177 15.979,-28.491 15.954,-28.491 15.784,-28.321 v1(15.687,-28.321) ; 20.718,-23.47 18.948,-23.47 15.748,-26.67 15.748,-28.26 v1(15.687,-28.321)
XRES: C.6.2 J1.1 R12.1 SW1.1 U1.36 | length 17.3
  Top Layer w0.254: v1(22.225,-18.354) SW1.1@22.225,-16.764 ; SW1.1 22.668,-16.764 23.241,-16.191 23.241,-10.338 v1(23.3,-10.279)
  Bottom Layer w0.254: U1.36 21.874,-20.495 22.568,-19.801 22.245,-19.478 22.245,-18.374 v1(22.225,-18.354) ; v1@23.495,-10.16 R12.1@24.511,-9.144 ; R12.1 24.65,-9.664 25.435,-10.449 27.224,-10.449 J1.1
pads on no net: U1.1 U1.11 U1.12 U1.13 U1.15 U1.20 U1.22 U1.23 U1.26 U1.27 U1.30 U1.31 U1.42 U1.43

## Polygon pours and split planes (outlines as drawn)
VSS_Capsense on Bottom Layer "VSSA_capsense_top" (hatched 45Degree grid 1.778 track 0.178, pour order 14): 49.149,-35.372 49.149,-27.498 36.703,-27.498 27.178,-27.498 27.178,-35.372
GND on Bottom Layer "gnd" (solid, remove dead copper, pour order 6): 31.81,-24.892 31.81,-27.244 10.717,-27.244 10.717,-31.054 0,-31.054 0,0 46.996,0 46.996,-24.892
VSS_Capsense on Top Layer "VSS_CAPSENSE_L01_P013" (hatched 45Degree grid 1.143 track 0.178, pour order 13): 23.228,-25.09 16.31,-32.008 -3.045,-32.008 -3.045,-77.448 21.771,-77.448 21.771,-35.876 47.955,-35.672 47.967,-25.09
GND on Top Layer "Top Layer-GND" (solid, remove dead copper, pour order 8): 20.985,-26.924 16.183,-31.726 -0.584,-31.726 -0.584,0.859 50.444,0.859 50.444,-26.924

## Other copper
Top Layer:
  region net TX4: 42.327,-64.318 44.095,-62.551 45.863,-64.318 44.095,-66.086
  region net TX3: 38.084,-43.163 39.852,-41.396 41.62,-43.163 39.852,-44.931
  region net RX0_PAD: 27.477,-41.042 29.244,-39.274 31.012,-41.042 29.244,-42.81
  region net RX0_PAD: 25.001,-42.81 25.001,-39.274 26.769,-41.042
  region net TX4: 42.327,-43.163 44.095,-41.396 45.863,-43.163 44.095,-44.931
  region net TX2: 33.841,-43.163 35.609,-41.396 37.377,-43.163 35.609,-44.931
  region net TX1: 29.598,-43.163 31.366,-41.396 33.134,-43.163 31.366,-44.931
  region net RX0_PAD: 37.73,-42.81 35.963,-41.042 37.73,-39.274 39.498,-41.042
  region net RX0_PAD: 41.973,-42.81 40.206,-41.042 41.973,-39.274 43.741,-41.042
  region net RX0_PAD: 46.216,-42.81 44.449,-41.042 46.216,-39.274
  region net RX0_PAD: 31.719,-41.042 33.487,-39.274 35.255,-41.042 33.487,-42.81
  region net TX0: 25.355,-43.163 27.123,-41.396 28.891,-43.163 27.123,-44.931
  region net TX3: 38.084,-47.386 39.852,-45.619 41.62,-47.386 39.852,-49.154
  region net RX1_PAD: 27.477,-45.265 29.244,-43.497 31.012,-45.265 29.244,-47.033
  region net RX1_PAD: 25.001,-47.033 25.001,-43.497 26.769,-45.265
  region net TX4: 42.327,-47.386 44.095,-45.619 45.863,-47.386 44.095,-49.154
  region net TX2: 33.841,-47.386 35.609,-45.619 37.377,-47.386 35.609,-49.154
  region net TX1: 29.598,-47.386 31.366,-45.619 33.134,-47.386 31.366,-49.154
  region net RX1_PAD: 37.73,-47.033 35.963,-45.265 37.73,-43.497 39.498,-45.265
  region net RX1_PAD: 41.973,-47.033 40.206,-45.265 41.973,-43.497 43.741,-45.265
  region net RX1_PAD: 46.216,-47.033 44.449,-45.265 46.216,-43.497
  region net RX1_PAD: 31.719,-45.265 33.487,-43.497 35.255,-45.265 33.487,-47.033
  region net TX0: 25.355,-47.386 27.123,-45.619 28.891,-47.386 27.123,-49.154
  region net TX3: 38.084,-51.609 39.852,-49.842 41.62,-51.609 39.852,-53.377
  region net RX2_PAD: 27.477,-49.488 29.244,-47.72 31.012,-49.488 29.244,-51.256
  region net RX2_PAD: 25.001,-51.256 25.001,-47.72 26.769,-49.488
  region net TX4: 42.327,-51.609 44.095,-49.842 45.863,-51.609 44.095,-53.377
  region net TX2: 33.841,-51.609 35.609,-49.842 37.377,-51.609 35.609,-53.377
  region net TX1: 29.598,-51.609 31.366,-49.842 33.134,-51.609 31.366,-53.377
  region net RX2_PAD: 37.73,-51.256 35.963,-49.488 37.73,-47.72 39.498,-49.488
  region net RX2_PAD: 41.973,-51.256 40.206,-49.488 41.973,-47.72 43.741,-49.488
  region net RX2_PAD: 46.216,-51.256 44.449,-49.488 46.216,-47.72
  region net RX2_PAD: 31.719,-49.488 33.487,-47.72 35.255,-49.488 33.487,-51.256
  region net TX0: 25.355,-51.609 27.123,-49.842 28.891,-51.609 27.123,-53.377
  region net TX3: 38.084,-55.832 39.852,-54.065 41.62,-55.832 39.852,-57.6
  region net RX3_PAD: 27.477,-53.711 29.244,-51.943 31.012,-53.711 29.244,-55.479
  region net RX3_PAD: 25.001,-55.479 25.001,-51.943 26.769,-53.711
  region net TX4: 42.327,-55.832 44.095,-54.065 45.863,-55.832 44.095,-57.6
  region net TX2: 33.841,-55.832 35.609,-54.065 37.377,-55.832 35.609,-57.6
  region net TX1: 29.598,-55.832 31.366,-54.065 33.134,-55.832 31.366,-57.6
  region net RX3_PAD: 37.73,-55.479 35.963,-53.711 37.73,-51.943 39.498,-53.711
  region net RX3_PAD: 41.973,-55.479 40.206,-53.711 41.973,-51.943 43.741,-53.711
  region net RX3_PAD: 46.216,-55.479 44.449,-53.711 46.216,-51.943
  region net RX3_PAD: 31.719,-53.711 33.487,-51.943 35.255,-53.711 33.487,-55.479
  region net TX0: 25.355,-55.832 27.123,-54.065 28.891,-55.832 27.123,-57.6
  region net TX0: 25.355,-55.832 27.123,-54.065 28.891,-55.832 27.123,-57.6
  region net TX0: 25.355,-60.075 27.123,-58.308 28.891,-60.075 27.123,-61.843
  region net TX0: 25.355,-64.318 27.123,-62.551 28.891,-64.318 27.123,-66.086
  region net TX0: 25.355,-68.561 27.123,-66.794 28.891,-68.561 27.123,-70.329
  region net TX0: 25.355,-72.804 27.123,-71.037 28.891,-72.804
  region net TX0: 25.355,-38.92 28.891,-38.92 27.123,-40.688
  region net RX3_PAD: 31.719,-53.711 33.487,-51.943 35.255,-53.711 33.487,-55.479
  region net RX3_PAD: 46.216,-55.479 44.449,-53.711 46.216,-51.943
  region net RX3_PAD: 41.973,-55.479 40.206,-53.711 41.973,-51.943 43.741,-53.711
  region net RX3_PAD: 37.73,-55.479 35.963,-53.711 37.73,-51.943 39.498,-53.711
  region net TX1: 29.598,-38.92 33.134,-38.92 31.366,-40.688
  region net TX1: 29.598,-72.804 31.366,-71.037 33.134,-72.804
  region net TX1: 29.598,-68.561 31.366,-66.794 33.134,-68.561 31.366,-70.329
  region net TX1: 29.598,-64.318 31.366,-62.551 33.134,-64.318 31.366,-66.086
  region net TX1: 29.598,-60.075 31.366,-58.308 33.134,-60.075 31.366,-61.843
  region net TX1: 29.598,-55.832 31.366,-54.065 33.134,-55.832 31.366,-57.6
  region net TX2: 33.841,-38.92 37.377,-38.92 35.609,-40.688
  region net TX2: 33.841,-72.804 35.609,-71.037 37.377,-72.804
  region net TX2: 33.841,-68.561 35.609,-66.794 37.377,-68.561 35.609,-70.329
  region net TX2: 33.841,-64.318 35.609,-62.551 37.377,-64.318 35.609,-66.086
  region net TX2: 33.841,-60.075 35.609,-58.308 37.377,-60.075 35.609,-61.843
  region net TX2: 33.841,-55.832 35.609,-54.065 37.377,-55.832 35.609,-57.6
  region net TX3: 38.084,-38.92 41.62,-38.92 39.852,-40.688
  region net TX3: 38.084,-72.804 39.852,-71.037 41.62,-72.804
  region net TX3: 38.084,-68.561 39.852,-66.794 41.62,-68.561 39.852,-70.329
  region net TX3: 38.084,-64.318 39.852,-62.551 41.62,-64.318 39.852,-66.086
  region net TX3: 38.084,-60.075 39.852,-58.308 41.62,-60.075 39.852,-61.843
  region net TX4: 42.327,-38.92 45.863,-38.92 44.095,-40.688
  region net TX4: 42.327,-72.804 44.095,-71.037 45.863,-72.804
  region net TX4: 42.327,-68.561 44.095,-66.794 45.863,-68.561 44.095,-70.329
  region net TX4: 42.327,-60.075 44.095,-58.308 45.863,-60.075 44.095,-61.843
  region net TX4: 42.327,-55.832 44.095,-54.065 45.863,-55.832 44.095,-57.6
  region net RX4_PAD: 37.75,-59.702 35.982,-57.934 37.75,-56.167 39.518,-57.934
  region net RX4_PAD: 41.993,-59.702 40.225,-57.934 41.993,-56.167 43.761,-57.934
  region net RX4_PAD: 46.236,-59.702 44.468,-57.934 46.236,-56.167
  region net RX4_PAD: 25.021,-59.702 25.021,-56.167 26.789,-57.934
  region net RX4_PAD: 27.496,-57.934 29.264,-56.167 31.032,-57.934 29.264,-59.702
  region net RX4_PAD: 31.739,-57.934 33.507,-56.167 35.274,-57.934 33.507,-59.702
  region net RX5_PAD: 37.75,-63.945 35.982,-62.177 37.75,-60.41 39.518,-62.177
  region net RX5_PAD: 41.993,-63.945 40.225,-62.177 41.993,-60.41 43.761,-62.177
  region net RX5_PAD: 46.236,-63.945 44.468,-62.177 46.236,-60.41
  region net RX5_PAD: 25.021,-63.945 25.021,-60.41 26.789,-62.177
  region net RX5_PAD: 27.496,-62.177 29.264,-60.41 31.032,-62.177 29.264,-63.945
  region net RX5_PAD: 31.739,-62.177 33.507,-60.41 35.274,-62.177 33.507,-63.945
  region net RX6_PAD: 37.75,-68.188 35.982,-66.42 37.75,-64.653 39.518,-66.42
  region net RX6_PAD: 41.993,-68.188 40.225,-66.42 41.993,-64.653 43.761,-66.42
  region net RX6_PAD: 46.236,-68.188 44.468,-66.42 46.236,-64.653
  region net RX6_PAD: 25.021,-68.188 25.021,-64.653 26.789,-66.42
  region net RX6_PAD: 27.496,-66.42 29.264,-64.653 31.032,-66.42 29.264,-68.188
  region net RX6_PAD: 31.739,-66.42 33.507,-64.653 35.274,-66.42 33.507,-68.188
  region net RX7_PAD: 37.75,-72.431 35.982,-70.663 37.75,-68.896 39.518,-70.663
  region net RX7_PAD: 41.993,-72.431 40.225,-70.663 41.993,-68.896 43.761,-70.663
  region net RX7_PAD: 46.236,-72.431 44.468,-70.663 46.236,-68.896
  region net RX7_PAD: 25.021,-72.431 25.021,-68.896 26.789,-70.663
  region net RX7_PAD: 27.496,-70.663 29.264,-68.896 31.032,-70.663 29.264,-72.431
  region net RX7_PAD: 31.739,-70.663 33.507,-68.896 35.274,-70.663 33.507,-72.431
  region net RX3_PAD: 25.001,-55.479 25.001,-51.943 26.769,-53.711
  region net RX3_PAD: 27.477,-53.711 29.244,-51.943 31.012,-53.711 29.244,-55.479
  region net TX3: 38.084,-55.832 39.852,-54.065 41.62,-55.832 39.852,-57.6
Bottom Layer:
  region net VSS_Capsense: 46.356,-27.407 27.94,-27.407 27.94,-27.927 46.356,-27.927
  region net GND: 33.655,-25.908 32.664,-24.917 32.055,-24.917 32.055,-19.304 38.329,-19.304 38.329,-21.643 34.671,-25.281 34.671,-25.908
  region net VSSD: 25.684,-23.023 25.237,-23.47 25.237,-22.556 25.161,-22.48 24.638,-21.937 24.638,-20.513 24.384,-20.259 23.876,-20.259 23.749,-20.132 23.749,-19.243 25.4,-19.243 25.969,-19.812 29.439,-19.812 31.182,-21.555 30.713,-22.354 30.396,-22.037 26.235,-22.037 25.685,-22.588
  region net VSSA: 31.098,-25.112 31.81,-25.823 31.023,-26.609 26.254,-26.609 25.236,-24.97 25.495,-24.97 26.118,-25.593 26.254,-25.593 30.617,-25.593
  pour cut-out: 32.055,-27.244 27.94,-27.244 27.94,-31.562 31.115,-34.737 33.147,-34.737 42.672,-34.737 46.863,-38.928 46.863,-73.472 10.668,-73.472 10.668,-18.415 12.827,-16.256 27.686,-16.256 32.055,-20.625

## Silkscreen, mask and mechanical layers (free items; w line width, h text height)
Top Overlay:
  drawing of 22 lines, arcs and shapes, not listed
  text "SCL /  / SDA" at 14.224,-11.303 h1.02
  text "MOSI   SCLK /  / MISO   SSEL" at 17.526,-11.303 h1.02
  text "GND /  / 3v3" at 23.876,-11.303 h1.02
  text "Reset" at 23.241,-19.929 h1.02
  text "Sahasrara" at 13.919,-36.363 h1.02
  text "1.6" at 26.543,-38.663 h1.02
  text "1.5" at 30.785,-38.663 h1.02
  text "1.4" at 35.027,-38.674 h1.02
  text "1.3" at 39.268,-38.663 h1.02
  text "1.2" at 43.51,-38.674 h1.02
  text "Capsense CSX  / 5x8 TouchPad / by JCSB" at 14.427,-39.665 h1.02
  text "2.0" at 23.494,-41.203 h1.02
  text "(0, 0)" at 26.035,-41.29 h1.02
  text "2.1" at 23.494,-45.456 h1.02
  text "2.2" at 23.494,-49.698 h1.02
  text "2.3" at 23.494,-53.928 h1.02
  text "2.4" at 23.494,-58.181 h1.02
  text "2.5" at 23.494,-62.412 h1.02
  text "2.6" at 23.494,-66.654 h1.02
  text "2.7" at 23.494,-70.907 h1.02
  text "(5, 8)" at 43.002,-70.932 h1.02
Mechanical 1:
  lines w0.203: -0.022,-4.83 ccw(c1.152,-4.83) 1.152,-6.004 2.347,-6.004 cw(c2.347,-7.167) 3.51,-7.167 3.51,-31.726 12.7,-40.915 12.7,-72.435 ccw(c13.809,-72.435) 13.809,-73.545 ; -0.009,-4.83 -0.009,-1.186 cw(c1.177,-1.186) 1.177,0 45.034,0 ; 13.809,-73.533 45.925,-73.533 ccw(c45.925,-72.461) 46.996,-72.461 ; 42.666,-7.151 cw(c43.813,-7.151) 43.813,-6.004 ; 42.672,-7.151 42.672,-21.844 43.942,-23.114 46.99,-26.162 46.99,-72.461 ; 43.864,-6.004 45.076,-6.004 ccw(c45.076,-4.83) 46.25,-4.83 ; 45.042,0.009 cw(c45.042,-1.177) 46.228,-1.177 ; 46.237,-4.83 46.237,-1.186